# EAGLE board bday1 (EAGLE 7.7.0)
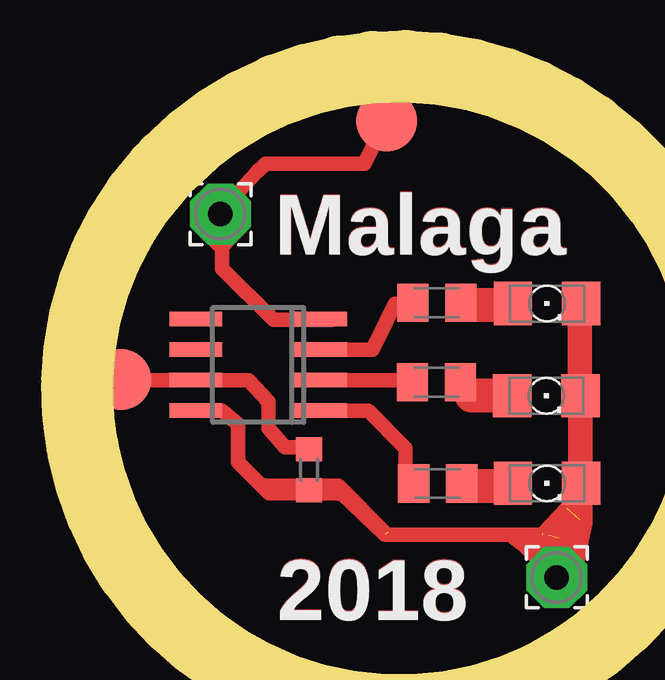
[diagram p0: board, top side]

No outline drawn. Coordinates in mm, seen from the top.
Copper layers (1*16): Top 0.035mm / dielectric 1.5mm / Bottom 0.035mm
Design rules "default": minimum track width 6mil, minimum drill 0.35mm, track to track 6mil, track to pad 6mil, pad to pad 6mil, via to via 6mil, smd to smd 6mil, copper to edge 40mil, drill to drill 6mil, minimum pad ring 10mil, minimum via ring 8mil, stop-mask expansion 4mil, vias tented up to drill 0mil, thermal gap 10mil
Milling: 1 lines

## Footprints (pad centres in the part's own frame; a part is rotated, then mirrored left to right if it is on the bottom)
SO8 = smd 0.6 x 2.2: 1 -1.905,-2.6; 2 -0.635,-2.6; 3 0.635,-2.6; 4 1.905,-2.6; 5 1.905,2.6; 6 0.635,2.6; 7 -0.635,2.6; 8 -1.905,2.6
R0603 = smd 1 x 1.1: 1 -0.85,0; 2 0.85,0
LED_1206 = smd 1.6 x 1.803: A -1.422,0; C 1.422,0
C0805K = smd 1.3 x 1.6: 1 -1,0; 2 1,0
B2,54 = smd 2.54 x 2.54: TP 0,0
2,54/1,0 = drill 1.016 pad 2.54 octagon: 1 0,0

## Placement (x,y rotation side)
E$1  [SO8]  11.43,15.24 90 top
E$2  [R0603]  13.55,10.87 90 top
E$3  [LED_1206]  23.47,17.8 0 top
E$4  [LED_1206]  23.44,13.96 0 top
E$8  [LED_1206]  23.47,10.3 0 top
E$9  [C0805K]  18.88,17.83 0 top
E$10  [B2,54]  16.79,25.4 0 top
E$11  [C0805K]  18.86,14.52 0 top
E$12  [C0805K]  18.91,10.29 0 top
S$14  [B2,54]  5.7,14.62 0 top
VCC  [2,54/1,0]  9.86,21.52 0 top
VCC1  [2,54/1,0]  23.87,6.38 0 top

## Library data of the parts
E$1 = analog-devices
E$2 = smd-ipc
E$3 E$4 E$8 = eagle-ltspice
E$9 E$11 E$12 = rcl
E$10 S$14 = testpad
VCC VCC1 = wirepad

## Tracks (layer width: path | path; a pad name or v marks a point on that pad's centre or on a via)
GND  (3 unrouted)
  Top 0.406: 11.7,10.31 14.82,10.3 16.85,8.27
  Top 0.61: 9.04,13.33 9.93,13.33 10.6,12.77 10.6,11.19 11.89,9.89 14.86,9.88 14.77,9.88 14.92,9.87 16.73,8.16 23.3,8.16 23.41,8.27 | 23.31,8.21 24.31,9.26
  Top 1.016: 24.83,17.81 24.86,8.76
S$1
  Top 0.152: 10.09,21.52 | 10.09,21.52 10.56,21.05
S$2
  Top 1.422: 20.3,17.74 21.57,17.74
S$3
  Top 1.422: 20.32,13.97 21.59,13.97
S$4
  Top 1.422: 20.34,10.21 21.61,10.21
S$5
  Top 0.61: 14.73,15.88 16.19,15.88 16.76,17.02 17.13,17.8 18.15,17.8
S$6
  Top 0.61: 16.32,14.6 17.3,14.6 18.09,14.05
S$7
  Top 0.61: 14.53,13.33 16.04,13.32 17.56,11.77 17.56,10.66 18.2,10.01
S$8
  Top 0.61: 9.57,14.6 11.03,14.6 11.85,13.7 11.85,12.61 12.55,11.81 13.68,11.81
S$9
  Top 0.61: 14.89,14.6 16.56,14.6
S$10  (1 unrouted)
  Top 0.305: 24.52,9.49 24.54,7.15
  Top 1.016: 24.54,7.15 24.28,7.16 24.28,7.38 23.53,8.14 | 23.92,6.19 23.96,6.19 23.96,8.01
S$11
  Top 1.016: 23.9,6.3 23.9,6.62 22.67,7.85
S$12
  Top 0.61: 10.7,21.99 9.9,20.12 9.27,20.75 9.38,20.86 10.6,20.86 10.71,20.97 10.71,22.08 9.6,20.97 9.41,20.97
S$13
  Top 0.406: 21.82,8.11 22.37,7.71
S$14
  Top 0.61: 8.43,14.6 5.99,14.6 5.95,14.71
S$15
  Top 0.305: 10.86,20.93 9.98,20.01
S$16
  Top 1.27: 24.5,8.81 24.42,8.81
S$17
  Top 0.305: 25.2,8.54 24.84,6.88 25.22,8.62 24.74,7.57 24.85,8.3
S$18
  Top 0.61: 9.74,21.5 11.39,23.29 11.73,23.63 15.86,23.63 16.74,25.41
VCC
  Top 0.61: 9.93,21.52 9.91,19.25 12.07,17.13 14.51,17.13

## Text on the board
Top: Malaga | 2018
tPlace: Malaga | 2018